# Altium PCB MotorDriver.PcbDoc
Units mil, origin at the board's own origin, x right, y up, seen from the top; angles counter-clockwise.
Board outline 3000 x 3005 mil, 2 copper layers (Top Layer, Bottom Layer); 40 components, 42 nets, 163 pads, 5 vias.
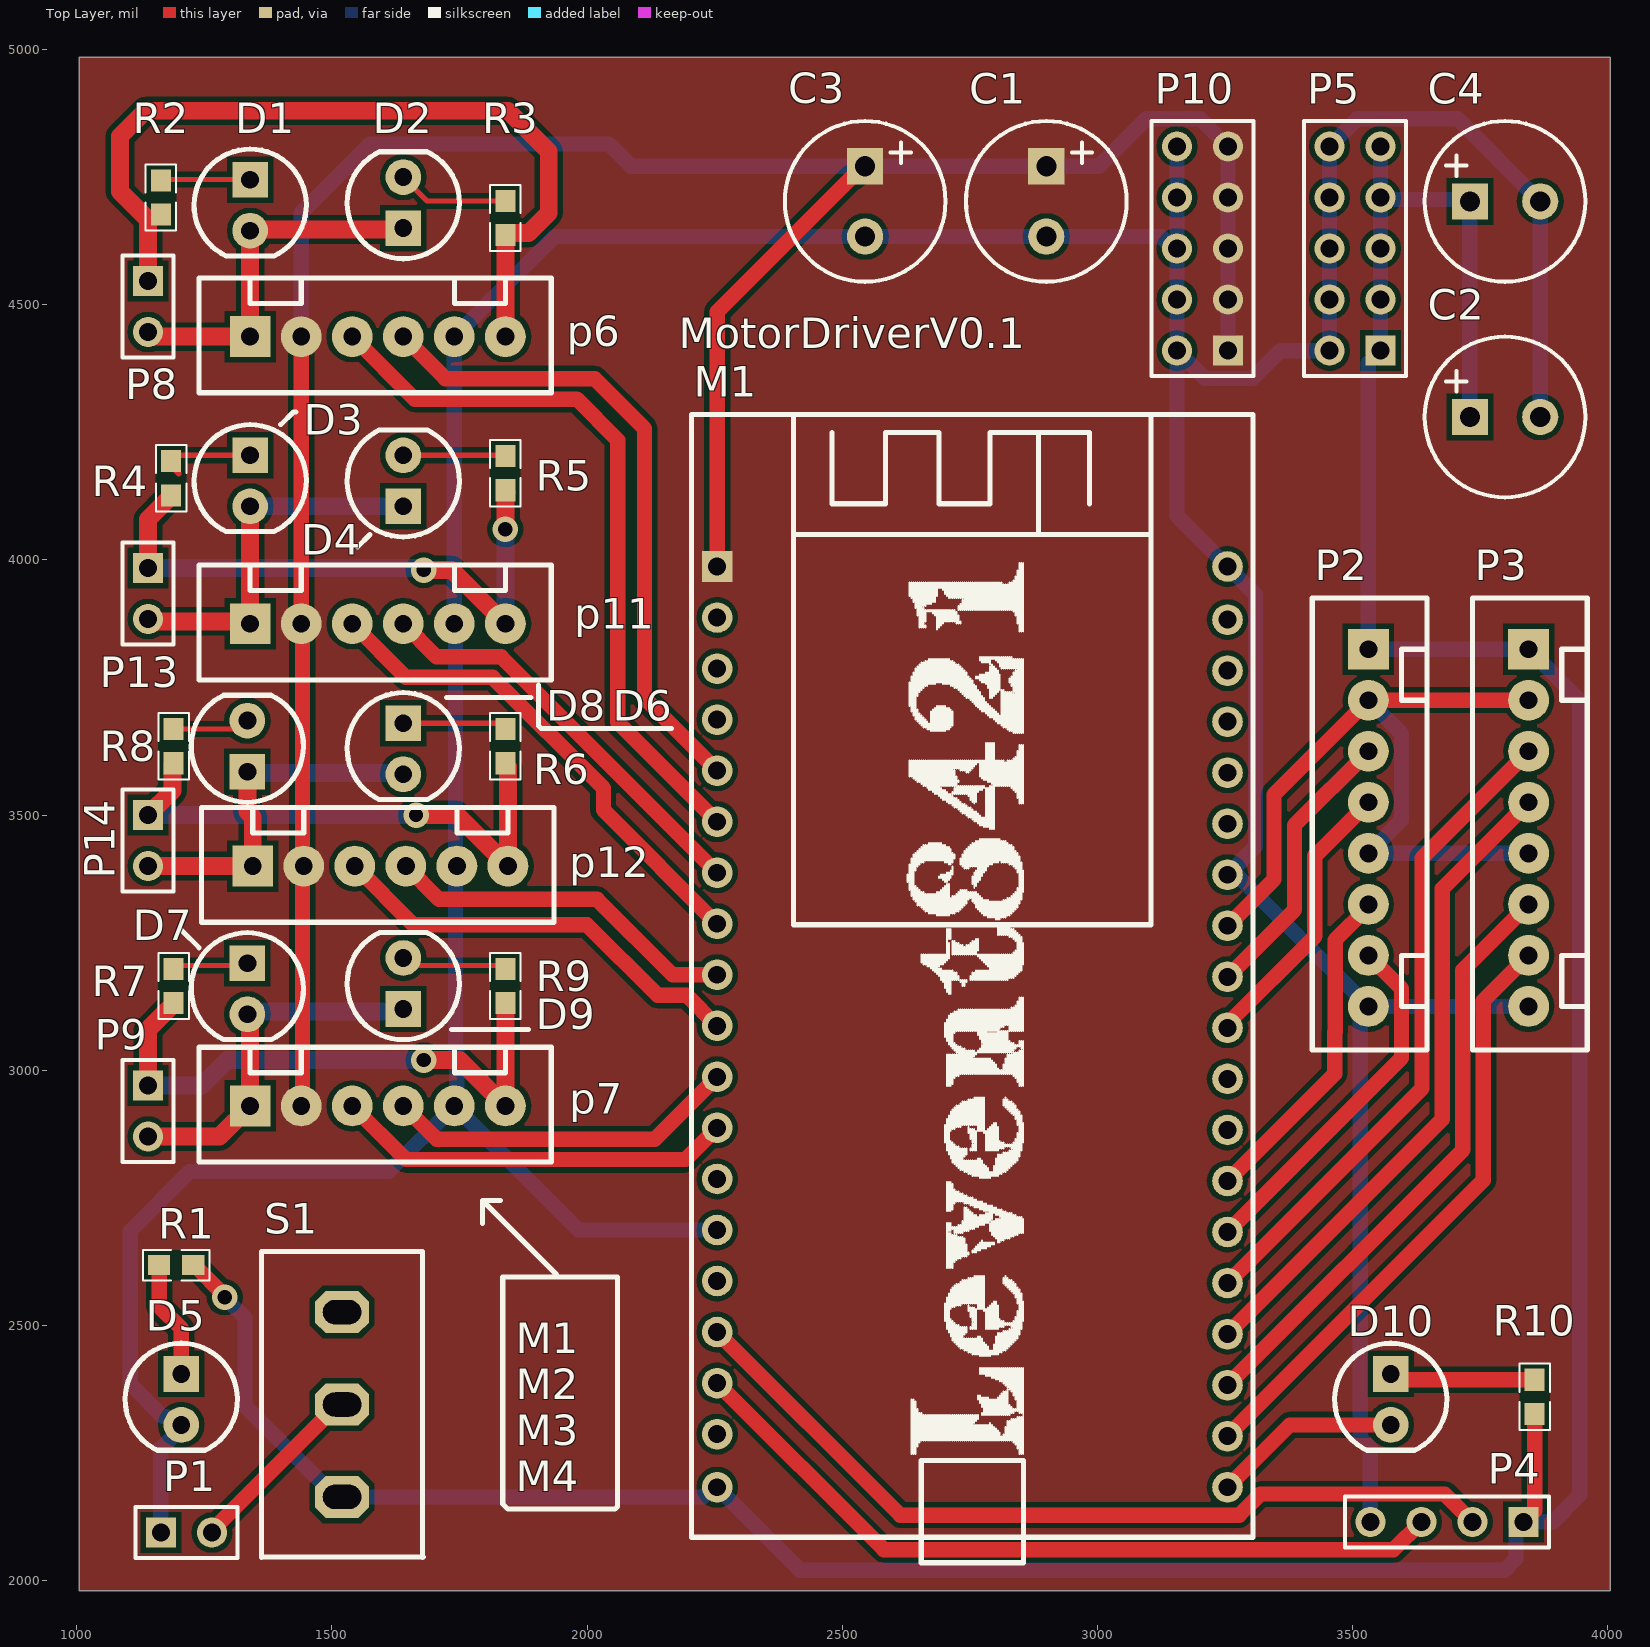
[diagram p0: Top Layer view]
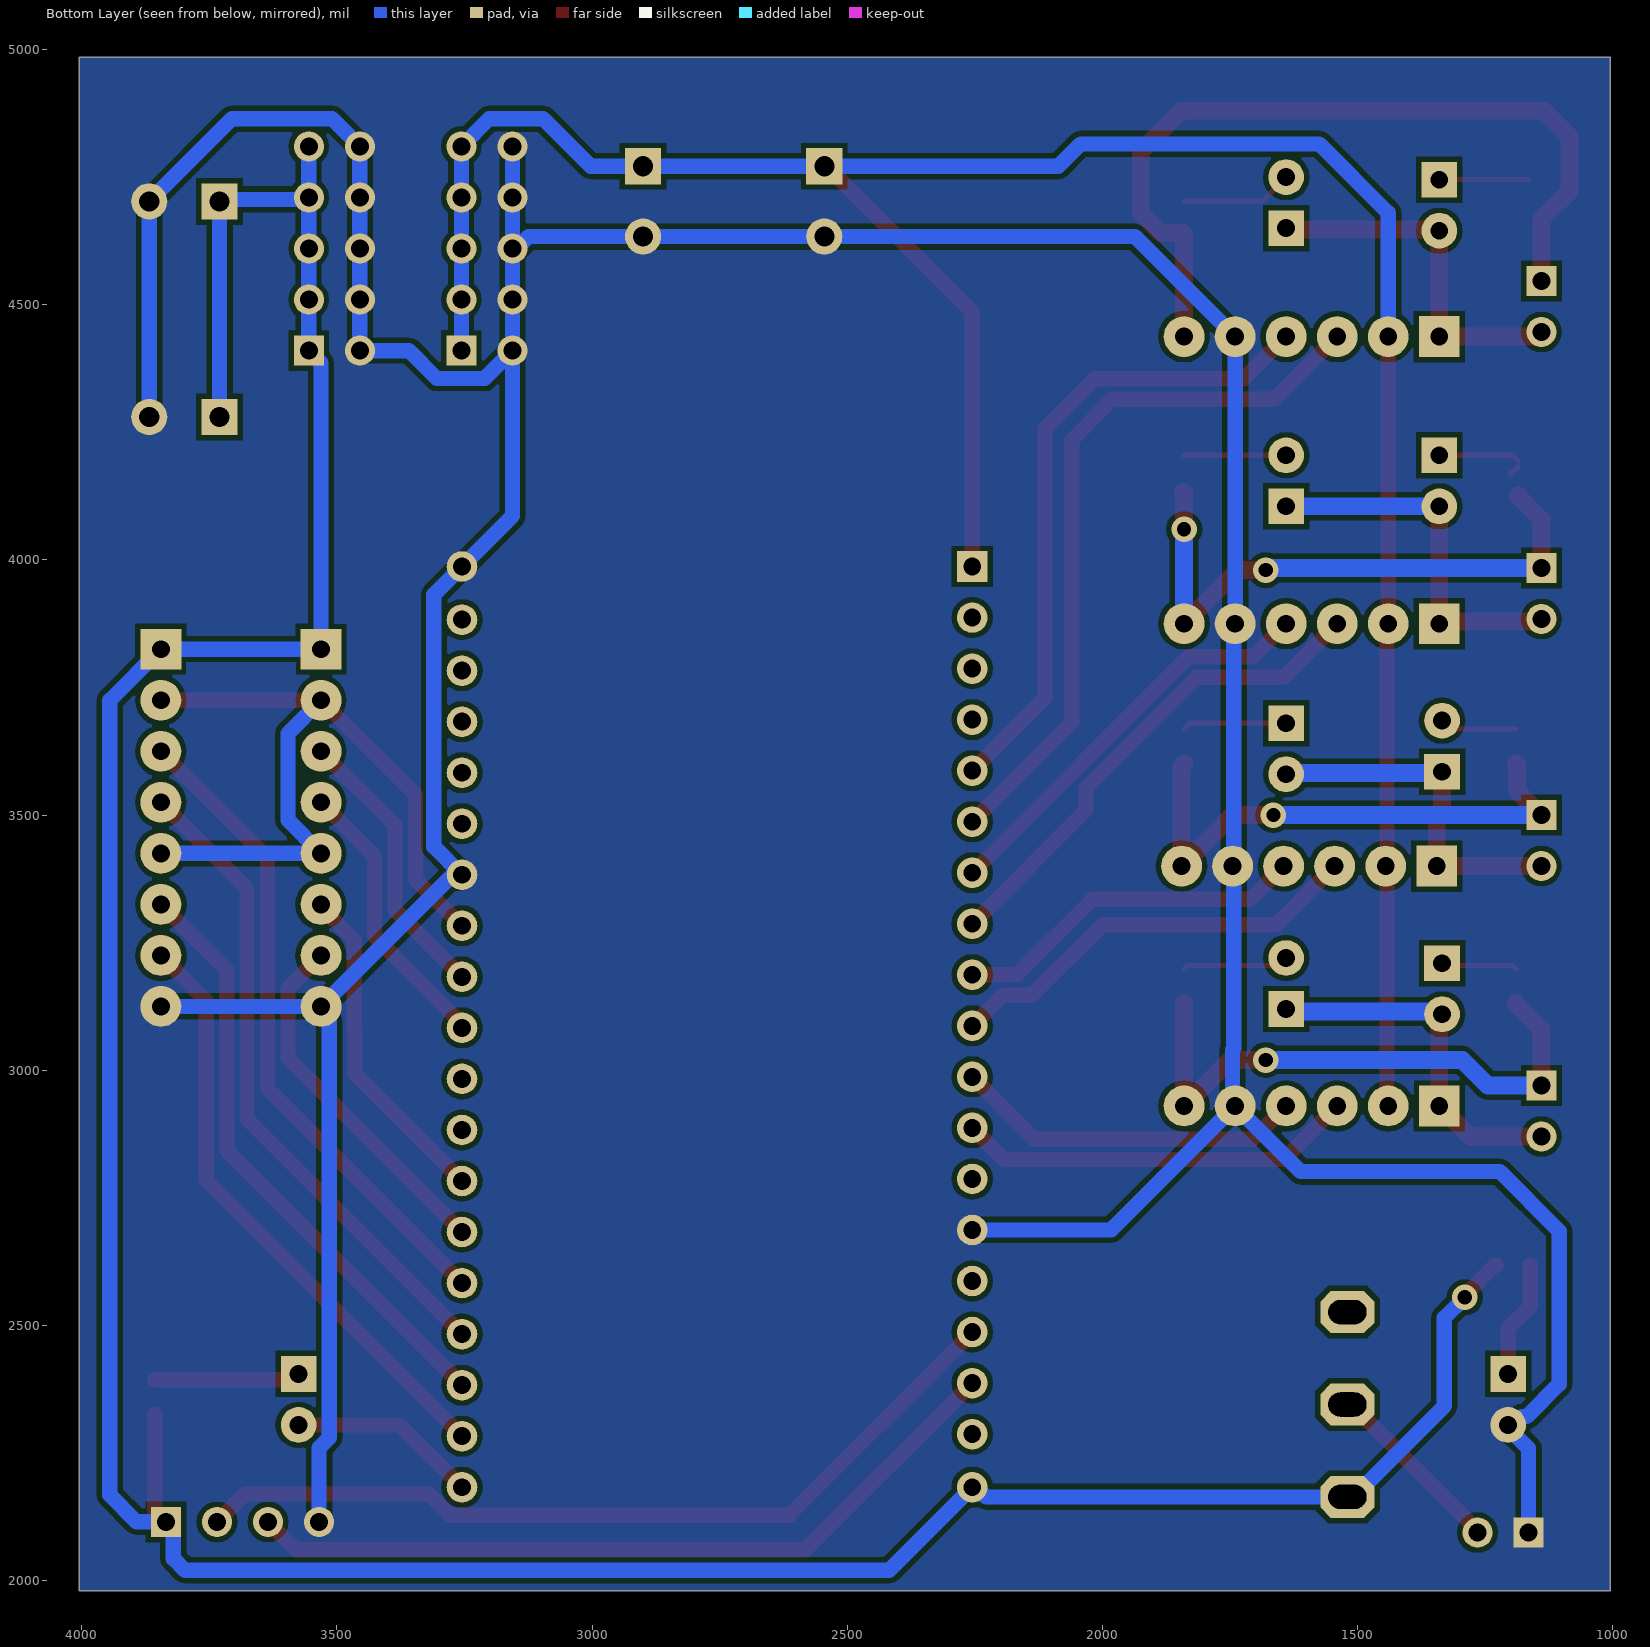
[diagram p1: Bottom Layer view, seen from below]

## Layer stack, top to bottom
Top Solder: solder mask 0.4, Solder Resist, Dk 3.5
Top Layer: signal copper 1.4
Dielectric 1: dielectric 12.6, FR-4, Dk 4.8
Bottom Layer: signal copper 1.4
Bottom Solder: solder mask 0.4, Solder Resist, Dk 3.5

## Board outline
1005,1980 1005,4985 4005,4985 4005,1985 4005,1980

## Design rules (kind name [scope] priority, off if disabled: settings)
Clearance [All] p1: gap=10 ignorepadtopadclearanceinfootprint=FALSE except(0: Arc-Hole Track-Hole SMDPad-Hole THPad-Hole Via-Hole Fill-Hole Poly-Hole Region-Hole Text-Hole)
PlaneConnect [All] p1: planeconnectstyle=Direct reliefexpansion=20 reliefentries=4 reliefconductorwidth=10 reliefairgap=10
PolygonConnect [All] p1: connectstyle=Direct reliefconductorwidth=10 reliefentries=4 polygonreliefangle="90 Angle" airgapwidth=10
RoutingVias [All] p1: holewidth=28 width=50 viastyle="Through Hole" minholewidth=28 minwidth=50 maxholewidth=28 maxwidth=50
SilkToSilkClearance [All] p1: silktosilkclearance=2
SilkToSolderMaskClearance [IsPad] p1: minsilkscreentomaskgap=2 clearancetoexposedcopper=TRUE
SolderMaskExpansion [All] p1: expansion=4 istentingtop=FALSE
Width DigitalPWR [InNetClass('DigitalPWR')] p1: maxlimit=30 minlimit=20 preferedwidth=25 minimp=50.000000 maximp=50.000000 favimp=50.000000
Width MotorPWR [InNetClass('MotorPWR')] p2: maxlimit=40 minlimit=30 preferedwidth=35 minimp=50.000000 maximp=50.000000 favimp=50.000000
Width [All] p3: maxlimit=30 minlimit=6 preferedwidth=15 minimp=50.000000 maximp=50.000000 favimp=50.000000
27 further rules are at their usual default settings.

## Classes and differential pairs
net class MotorPWR: M1_A M1_B M2_A M2_B M3_A M3_B M4_A M4_B
net class DigitalPWR: +3.3 +5 GND

## Components (designator, comment, footprint, x,y, rotation, side; value= is the part's Value field where it differs from the comment)
C1 "Cap Pol" C-RB-8 2900,4771.42 r270 top value=470uF
C2 "Cap Pol" C-RB-8 3730,4280 r0 top value=470uF
C3 "Cap Pol" C-RB-8 2545,4771.42 r270 top value=470uF
C4 "Cap Pol" C-RB-8 3730,4702.52 r0 top value=470uF
D1 "LED0" LED_DIP 1340,4695 r90 top
D2 "LED0" LED_DIP 1640,4700 r270 top
D3 "LED0" LED_DIP 1340,4155 r90 top
D4 "LED0" LED_DIP 1640,4155 r270 top
D5 "LED0" LED_DIP 1205,2355 r90 top
D6 "LED0" LED_DIP 1640,3630 r90 top
D7 "LED0" LED_DIP 1334.49,3159.69 r90 top
D8 "LED0" LED_DIP 1334.49,3635 r270 top
D9 "LED0" LED_DIP 1640,3170 r270 top
D10 "LED0" LED_DIP 3575,2355 r90 top
M1 "ESP32" ESP32-DEVKIT-38 2755,3085 r0 top
P1 "Header 2" HDR2X1_A 1165,2093.94 r0 top
P2 "H桥连接器" HDR8-PH2.54 3531.06,3475 r270 top
P3 "H桥连接器" HDR8-PH2.54 3845,3475 r270 top
P4 "Header 4" HDR4X1_A 3835,2115 r180 top
P5 "Header 5X2" HDR5X2_A1 3555,4410 r90 top
p6 "电机连接器" HDR6-XH2.54 1590,4437.43 r0 top
p7 "电机连接器" HDR6-XH2.54 1590,2930 r0 top
P8 "Header 2" HDR2X1_A 1140,4546.67 r270 top
P9 "Header 2" HDR2X1_A 1140,2970 r270 top
P10 "Header 5X2" HDR5X2_A1 3256.06,4410 r90 top
p11 "电机连接器" HDR6-XH2.54 1590,3875 r0 top
p12 "电机连接器" HDR6-XH2.54 1595,3400 r0 top
P13 "Header 2" HDR2X1_A 1140,3984.24 r270 top
P14 "Header 2" HDR2X1_A 1140,3500 r270 top
R1 "Res1" 0603-1 1195,2618.03 r0 top value=1K
R2 "Res1" 0603-1 1165,4710 r270 top value=2K
R3 "Res1" 0603-1 1840,4670 r270 top value=2K
R4 "Res1" 0603-1 1185,4160 r270 top value=2K
R5 "Res1" 0603-1 1840,4170 r270 top value=2K
R6 "Res1" 0603-1 1840,3635 r270 top value=2K
R7 "Res1" 0603-1 1190,3165 r270 top value=2K
R8 "Res1" 0603-1 1190,3635 r270 top value=2K
R9 "Res1" 0603-1 1840,3165 r270 top value=2K
R10 "Res1" 0603-1 3856.97,2360 r270 top value=1K
S1 "SW-SPDT" SWITCH_A1 1520,2526.1 r270 top

## Footprints (in the part's own frame and the unit in brackets; to place one, negate y for a bottom-side part, rotate by r counter-clockwise, add the part's x,y. Pads: shape width x height; smd on the part's side, far side on the other; paste and mask are expansions set on the pad)
0603-1 [mm] "贴片带丝印"
  rect 1.1x1 smd: 1(-0.85,0) 2(0.85,0)
  silkscreen extent -1.65,-0.76 1.65,0.76, body extent -1.14,-0.38 1.14,0.38, height 1
C-RB-8 [mm] "35V 220UF电容"
  rect 1.8x1.8 hole 1: 1(0,0)
  round 1.8 hole 1: 2(3.5,0)
  silkscreen extent -2.25,-4 5.75,4
ESP32-DEVKIT-38 [mil] "ESP32开发板-38引脚"
  rect 60x60 hole 35: 1(-500,902)
  round 60 hole 35: 2(-500,802) 3(-500,702) 4(-500,602) 5(-500,502) 6(-500,402) 7(-500,302) 8(-500,202) 9(-500,102) 10(-500,2) 11(-500,-98) 12(-500,-198) 13(-500,-298) 14(-500,-398) 15(-500,-498) 16(-500,-598) 17(-500,-698) 18(-500,-798) 19(-500,-902) 20(500,-902) 21(500,-802) 22(500,-702) 23(500,-602) 24(500,-502) 25(500,-402) 26(500,-302) 27(500,-202) 28(500,-102) 29(500,-2) 30(500,98) 31(500,198) 32(500,298) 33(500,398) 34(500,498) 35(500,598) 36(500,698) 37(500,798) 38(500,902)
  silkscreen extent -550,-1050 550,1200
HDR2X1_A [mm] "Connector; Header; 2 Position"
  rect 1.5x1.5 hole 0.9: 1(0,0)
  round 1.5 hole 0.9: 2(2.54,0)
  silkscreen extent -1.27,-1.27 3.81,1.27
HDR4X1_A [mm] "Connector; Header; 4 Position"
  rect 1.5x1.5 hole 0.9: 1(0,0)
  round 1.5 hole 0.9: 2(2.54,0) 3(5.08,0) 4(7.62,0)
  silkscreen extent -1.27,-1.27 8.89,1.27
HDR5X2_A1 [mm] "Connector; Header; 5x2 Position"
  rect 1.5x1.5 hole 0.9: 1(0,0)
  round 1.5 hole 0.9: 2(0,2.54) 3(2.54,0) 4(2.54,2.54) 5(5.08,0) 6(5.08,2.54) 7(7.62,0) 8(7.62,2.54) 9(10.16,0) 10(10.16,2.54)
  silkscreen extent -1.27,-1.27 11.43,3.81
HDR6-XH2.54 [mil]
  rect 80x80 hole 35: 1(-250,0)
  round 80 hole 35: 2(-150,0) 3(-50,0) 4(50,0) 5(150,0) 6(250,0)
  silkscreen extent -350,-110 340,115
HDR8-PH2.54 [mil] "PH2.54座"
  rect 80x80 hole 35: 1(-350,0)
  round 80 hole 35: 2(-250,0) 3(-150,0) 4(-50,0) 5(50,0) 6(150,0) 7(250,0) 8(350,0)
  silkscreen extent -450,-110 435,115
LED_DIP [mil]
  rect 70x70 hole 35: 1(50,0)
  round 70 hole 35: 2(-50,0)
  silkscreen extent -100,-110 110,110
SWITCH_A1 [mm] "扭子开关"
  oct 2.1x2.7 hole 1.2 slot 1.9 at 90 deg: 1(0,0) 2(4.6,0) 3(9.2,0)
  silkscreen extent -3.02,-4 12.22,4.06

## Part data
C1 C2 C3 C4: "极性电解电容", LatestRevisionDate=17-Jul-2002, LatestRevisionNote="Re-released for DXP Platform.", PackageReference=RB7.6-15, Published=8-Jun-2000, Publisher="Altium Limited", Vol=16V
D1 D2 D3 D4 D5 D6 D7 D8 D9 D10: "发光二极管", LatestRevisionDate=08-Jul-2005, LatestRevisionNote="Mech Layer 1 removed.", PackageReference=LED-0, Published=8-Jun-2000, Publisher="Altium Limited"
M1: library part ESP32-DEVKIT-38, "ESP32开发板，38引脚"
P1 P4 P5 P8 P9 P10 P13 P14: "接插件", LatestRevisionDate=17-Jul-2002, LatestRevisionNote="Re-released for DXP Platform.", Publisher="Altium Limited"
P2 P3: library part Driver_Connector, "两路H桥连接器"
p6 p7 p11 p12: library part Motor_Connector, "编码直流电机连接器"
R1 R2 R3 R4 R5 R6 R7 R8 R9 R10: "贴片电阻", LatestRevisionDate=17-Jul-2002, LatestRevisionNote="Re-released for DXP Platform.", PackageReference=AXIAL-0.4, Published=8-Jun-2000, Publisher="Altium Limited"
S1: "开关", ComponentLink1Description="Manufacturer Link", ComponentLink1URL=http://www.apem.com, DatasheetDocument=05-Dec-2000, LatestRevisionDate=17-Dec-2003, LatestRevisionNote="Schematic revised, PCB Footprint replaced.", PackageReference=TL36WW15050, Published=24-Mar-1999, Publisher="Altium Limited"

## Via types
v1: diameter 50, hole 28, Top Layer to Bottom Layer, 5 vias

## Nets (pads, with @x,y where several pads share a name; then routed paths per layer and width w, separated by ;. In a path a pad name is that pad's centre, name@x,y a point inside that pad or via, vN(x,y) a via of type N, cw(c..) or ccw(c..) an arc to the next point about the centre after c; other vN are vias at no path point)
+3.3: C1.1 C3.1 M1.1 p6.2 p7.2 P10.1 P10.3 P10.5 P10.7 P10.9 p11.2 p12.2 | length 5010.5
  Top Layer w30: p7.2 1442.5,2932.5 1442.5,3872.5 p11.2 p6.2 ; M1.1 2255,4485.94 2520.04,4750.98 2524.57,4750.98 C3.1
  Bottom Layer w30: p6.2 1440,4680 1575,4815 2042.81,4815 2086.39,4771.42 C3.1 C1.1 3002.99,4771.42 3096.1,4864.53 3201.54,4864.53 P10.9 P10.7 P10.5 P10.3 P10.1
+5: C2.1 C4.1 M1.19 P2.1 P3.1 P4.1 P5.1 P5.3 P5.5 P5.7 P5.9 R1.2 R10.2 S1.3 | length 7007.1
  Top Layer w30: R1.2 1230.43,2618.03 1290,2558.46 v1(1290,2555) ; P4.1 3856.97,2136.97 R10.2
  Bottom Layer w30: v1(1290,2555) 1330,2515 1330,2342.09 1508.19,2163.9 S1.3 2227.78,2163.9 2246.88,2183 M1.19 2418,2020 3797.43,2020 3820.47,2043.05 3820.47,2100.47 P4.1 3892.43,2115 3945,2167.57 3945,3725 P3.1 P2.1 3531.06,4386.06 P5.1 P5.3 P5.5 P5.7 ; P5.9 P5.7 ; C2.1 C4.1 3726.26,4706.26 3558.74,4706.26 P5.7
GND: C1.2 C2.2 C3.2 C4.2 D5.2 M1.14 M1.32 M1.38 P1.1 P2.8 P3.8 P4.4 P5.2 P5.4 P5.6 P5.8 P5.10 p6.5 p7.5 P10.2 P10.4 P10.6 P10.8 P10.10 p11.5 p12.5 | length 9938.1
  Bottom Layer w30: P1.1 1165,2259.27 1205,2299.27 D5.2 1194.18,2305 1177.61,2321.57 1168.43,2321.57 1105,2385 1105,2685 1221.46,2801.46 1611.46,2801.46 p7.5 ; M1.14 1983,2687 p7.5 ; P10.10 P10.8 P10.6 ; P4.4 3535,2260.15 3515,2280.15 3515,3095.41 3531.06,3111.47 P2.8 ; P3.8 P2.8 ; C2.2 C4.2 3705.79,4864.53 3509.53,4864.53 P5.10 P5.8 P5.6 P5.4 P5.2 3358.92,4410 3304.4,4355.47 3210.59,4355.47 P10.2 ; p7.5 1745,2935 1745,3040.71 1742.5,3043.21 1742.5,3397.5 p12.5 1742.5,3402.5 1742.5,3872.5 p11.5 p6.5 1936.19,4633.62 C3.2 C1.2 3124.58,4633.62 3148.2,4610 P10.6 ; P10.2 P10.4 P10.6 ; P10.2 3156.06,4085.94 M1.38 3310,3932 3310,3438 M1.32 3260.74,3377.26 3278.8,3377.26 P2.8
M1_A: D1.2 D2.1 p6.1 P8.2 | length 713.5
  Top Layer w35: P8.2 1146.51,4446.67 1155.75,4437.43 p6.1 D1.2 1342.5,4647.5 1637.5,4647.5 D2.1
M1_B: p6.6 P8.1 R2.2 R3.2 | length 1623.2
  Top Layer w35: P8.1 1140,4666.85 1085,4721.85 1085,4830 1135,4880 1845,4880 1925,4800 1925,4680 1885.69,4640.69 1842.19,4640.69 1840,4638.5 R3.2 p6.6
M1_C1: M1.5 p6.4 | length 1276.6
  Top Layer w30: p6.4 1722.43,4355 2015,4355 2112.5,4257.5 2112.5,3729.5 M1.5
M1_C2: M1.6 p6.3 | length 1432.6
  Top Layer w30: p6.3 1662.43,4315 1980,4315 2060,4235 2060,3682 M1.6
M1_DIR: M1.29 P2.4 | length 556.3
  Top Layer w30: M1.29 3255,3091.12 3426.2,3262.32 3426.2,3420.14 P2.4
M1_PWM: M1.30 P2.3 | length 556.3
  Top Layer w30: M1.30 3386.2,3314.2 3386.2,3480.14 P2.3
M2_A: D3.2 D4.1 p11.1 P13.2 | length 733.8
  Top Layer w35: P13.2 1144.6,3879.64 1335.36,3879.64 p11.1 D3.2
  Bottom Layer w35: D3.2 D4.1
M2_B: p11.6 P13.1 R4.2 R5.2 | length 1164
  Top Layer w35: P13.1 1140,4079.57 1185,4124.57 R4.2 ; v1(1680,3980) 1735,3980 p11.6 ; v1(1840,4060) 1840,4132.38 R5.2@1842.19,4132.38
  Bottom Layer w35: P13.1 v1@1680,3984.24 ; p11.6 v1(1840,4060)
M2_C1: M1.7 p11.4 | length 817.1
  Top Layer w30: p11.4 1705,3810 1832,3810 M1.7
M2_C2: M1.8 p11.3 | length 983.8
  Top Layer w30: p11.3 1645,3770 1815.16,3770 2032.21,3552.95 2032.21,3509.79 M1.8
M2_DIR: M1.25 P2.7 | length 710.2
  Top Layer w30: M1.25 3596.06,3024.06 3596.06,3160 P2.7
M2_PWM: M1.26 P2.6 | length 656.3
  Top Layer w30: M1.26 3465,2993 3465,3075 3466.06,3076.06 3466.06,3255.36 3531.06,3320.36 P2.6
M3_A: D6.2 D8.1 p12.1 P14.2 | length 709
  Top Layer w35: P14.2 p12.1 1345,3496.3 1334.49,3506.82 D8.1 D8.1@1336.99,3582.5 ; D6.2@1637.5,3582.5 D6.2
  Bottom Layer w35: D8.1 1336.99,3582.5 1637.5,3582.5 D6.2
M3_B: p12.6 P14.1 R6.2 R8.2 | length 1072.3
  Top Layer w35: P14.1 1187.81,3547.81 1187.81,3599.35 R8.2 ; v1(1665,3500) 1745,3500 p12.6 1845,3594.57 1840,3599.57 R6.2
  Bottom Layer w35: P14.1 v1(1665,3500)
M3_C1: M1.9 p12.4 | length 698.2
  Top Layer w30: p12.4 1710,3335 2020,3335 2168,3187 M1.9
M3_C2: M1.10 p12.3 | length 839.6
  Top Layer w30: p12.3 1660,3285 2000,3285 2138,3147 2195,3147 M1.10
M3_DIR: M1.23 P3.4 | length 1286.4
  Top Layer w30: M1.23 3676.06,2904.06 3676.06,3356.06 P3.4
M3_PWM: M1.24 P3.3 | length 1286.4
  Top Layer w30: M1.24 3636.06,2964.06 3636.06,3416.06 P3.3
M4_A: D7.2 D9.1 p7.1 P9.2 | length 711.9
  Top Layer w35: P9.2 1280,2870 p7.1 1340,3095.11 1334.49,3100.62 D7.2@1334.49,3105
  Bottom Layer w35: D7.2 1339.64,3114.85 1634.85,3114.85 D9.1
M4_B: p7.6 P9.1 R7.2 R9.2 | length 1141.8
  Top Layer w35: P9.1 1140,3079.57 1190,3129.57 R7.2 ; v1(1680,3020) 1750,3020 p7.6 R9.2
  Bottom Layer w35: P9.1 1245,2970 1295,3020 v1(1680,3020)
M4_C1: M1.11 p7.4 | length 692.5
  Top Layer w30: p7.4 1705,2865 2133,2865 M1.11
M4_C2: M1.12 p7.3 | length 784.2
  Top Layer w30: p7.3 1645,2825 2193,2825 M1.12
M4_DIR: M1.21 P3.7 | length 1186.4
  Top Layer w30: M1.21 3756.06,2784.06 3756.06,3136.06 P3.7
M4_PWM: M1.22 P3.6 | length 1186.4
  Top Layer w30: M1.22 3716.06,2844.06 3716.06,3196.06 P3.6
M_EN: M1.31 P2.2 P2.5 P3.2 P3.5 | length 1538.1
  Top Layer w30: M1.31 3346.2,3374.2 3346.2,3540.14 P2.2 P3.2
  Bottom Layer w30: P2.2 3596.06,3660 3596.06,3490 P2.5 P3.5
NetD1_1: D1.1 R2.1 | length 175.6
  Top Layer w10: R2.1 1166.54,4745 D1.1
NetD2_2: D2.2 R3.1 | length 219.3
  Top Layer w10: D2.2 1686.54,4703.46 R3.1
NetD3_1: D3.1 R4.1 | length 182.4
  Top Layer w10: R4.1 1196.54,4205 D3.1 ; R4.1@1185.31,4183.02 1200,4168.34 1200,4170.19
NetD4_2: D4.2 R5.1 | length 200.6
  Top Layer w10: D4.2 1838.46,4205 R5.1
NetD5_1: D5.1 R1.1 | length 231
  Top Layer w30: R1.1 1161.54,2537.1 1205,2493.63 D5.1
NetD6_1: D6.1 R6.1 | length 204.8
  Top Layer w10: D6.1 1828.46,3680 R6.1
NetD7_1: D7.1 R7.1 | length 147.2
  Top Layer w10: R7.1 1196.54,3205 D7.1@1334.49,3205
NetD8_2: D8.2 R8.1 | length 151.3
  Top Layer w10: R8.1 1306.81,3668.46 1323.34,3685 D8.2
NetD9_2: D9.2 R9.1 | length 202.7
  Top Layer w10: D9.2@1640,3205 1833.46,3205 R9.1
NetD10_1: D10.1 R10.1 | length 286.7
  Top Layer w30: D10.1 3580.73,2405 3592.27,2393.46 R10.1
NetP1_2: P1.2 S1.2 | length 361.3
  Top Layer w30: P1.2 1265,2097.87 1512.13,2345 S1.2
RXD: M1.16 P4.2 | length 1668.5
  Top Layer w30: M1.16 2614,2128 3277.78,2128 3319.31,2169.53 3680.47,2169.53 P4.2
STA_LED: D10.2 M1.20 | length 370.5
  Top Layer w30: M1.20 3377,2305 D10.2
TXD: M1.17 P4.3 | length 1537.8
  Top Layer w30: M1.17 2581.53,2060.47 3580.47,2060.47 P4.3
pads on no net: M1.2 M1.3 M1.4 M1.13 M1.15 M1.18 M1.27 M1.28 M1.33 M1.34 M1.35 M1.36 M1.37 S1.1

## Polygon pours and split planes (outlines as drawn)
+3.3 on Top Layer "+3.3_L01_P001" (solid, pour order 1): 1005,4985 4005,4985 4005,1980 1005,1980
GND on Bottom Layer "GND_L02_P000" (solid, pour order 0): 1005,4985 4005,4985 4005,1980 1005,1980

## Silkscreen, mask and mechanical layers (free items; w line width, h text height)
Top Overlay:
  drawing of 1011 lines, arcs and shapes, not listed
  text "MotorDriverV0.1" at 2180,4415 h60
  text "M1 / M2 / M3 / M4" at 1860,2175 h60
Mechanical 1:
  lines w10: 4005,1980 1005,1980 1005,4985 4005,4985 4005,1985